# EAGLE board clvHd-Panel (EAGLE 9.6.2), part 1 of 2
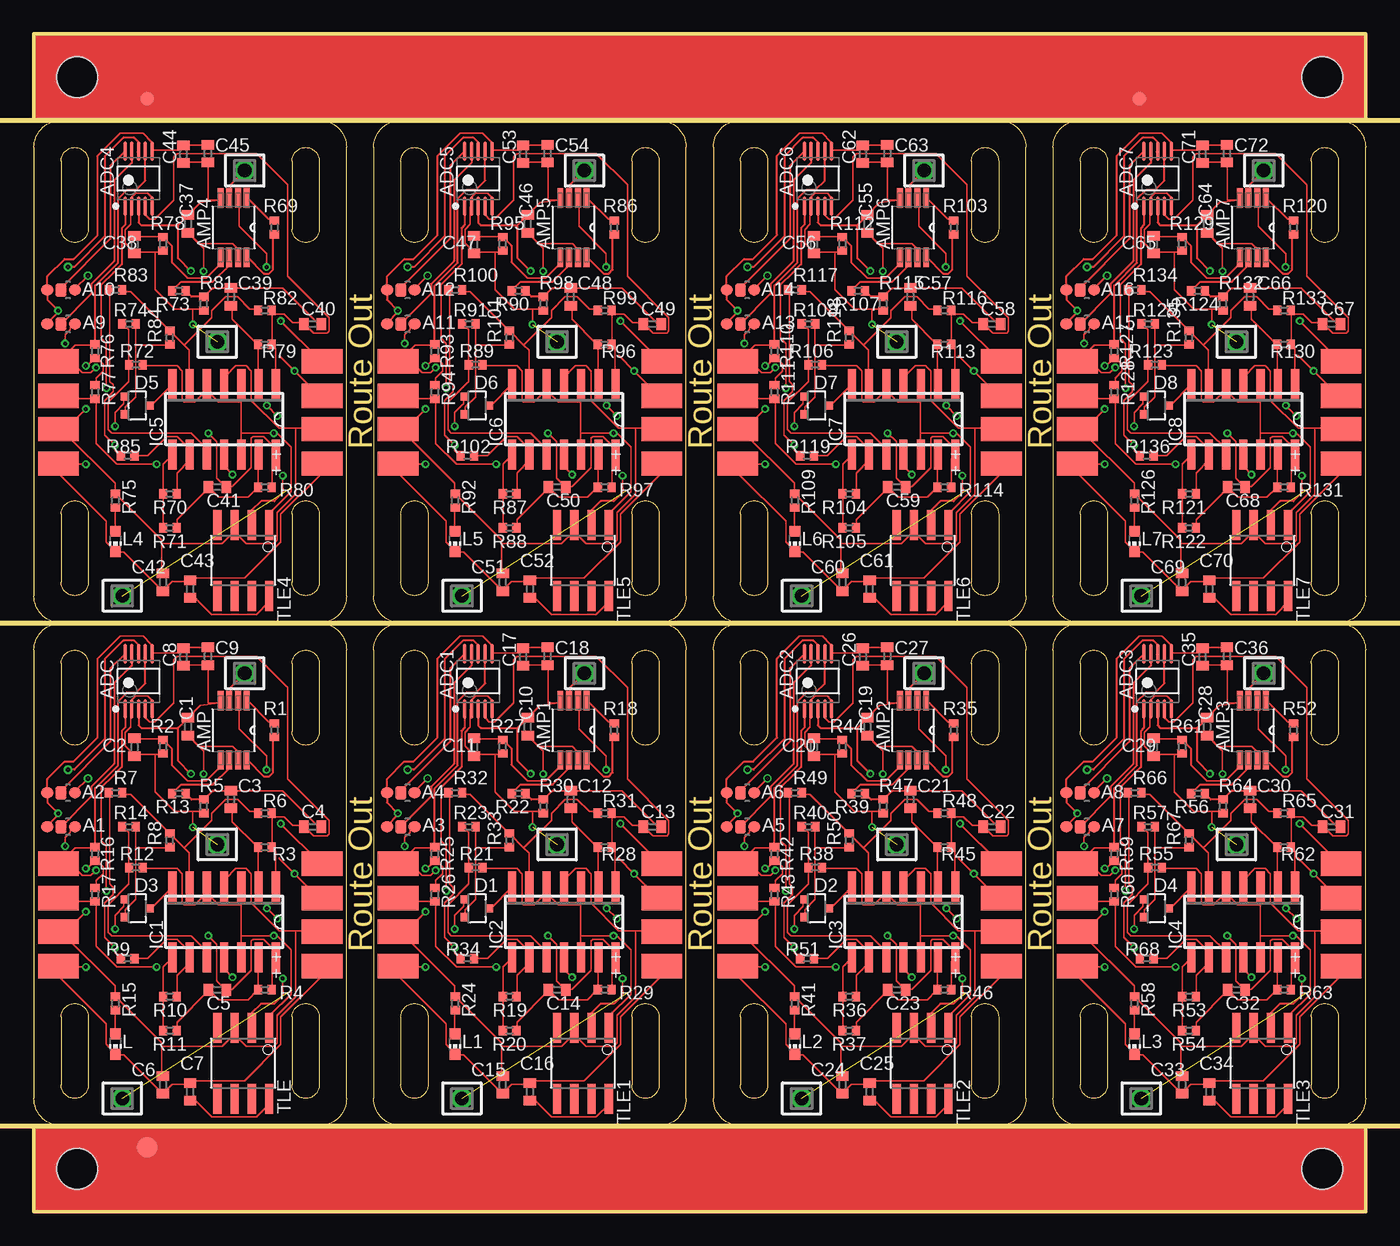
[diagram p0: board, top side]
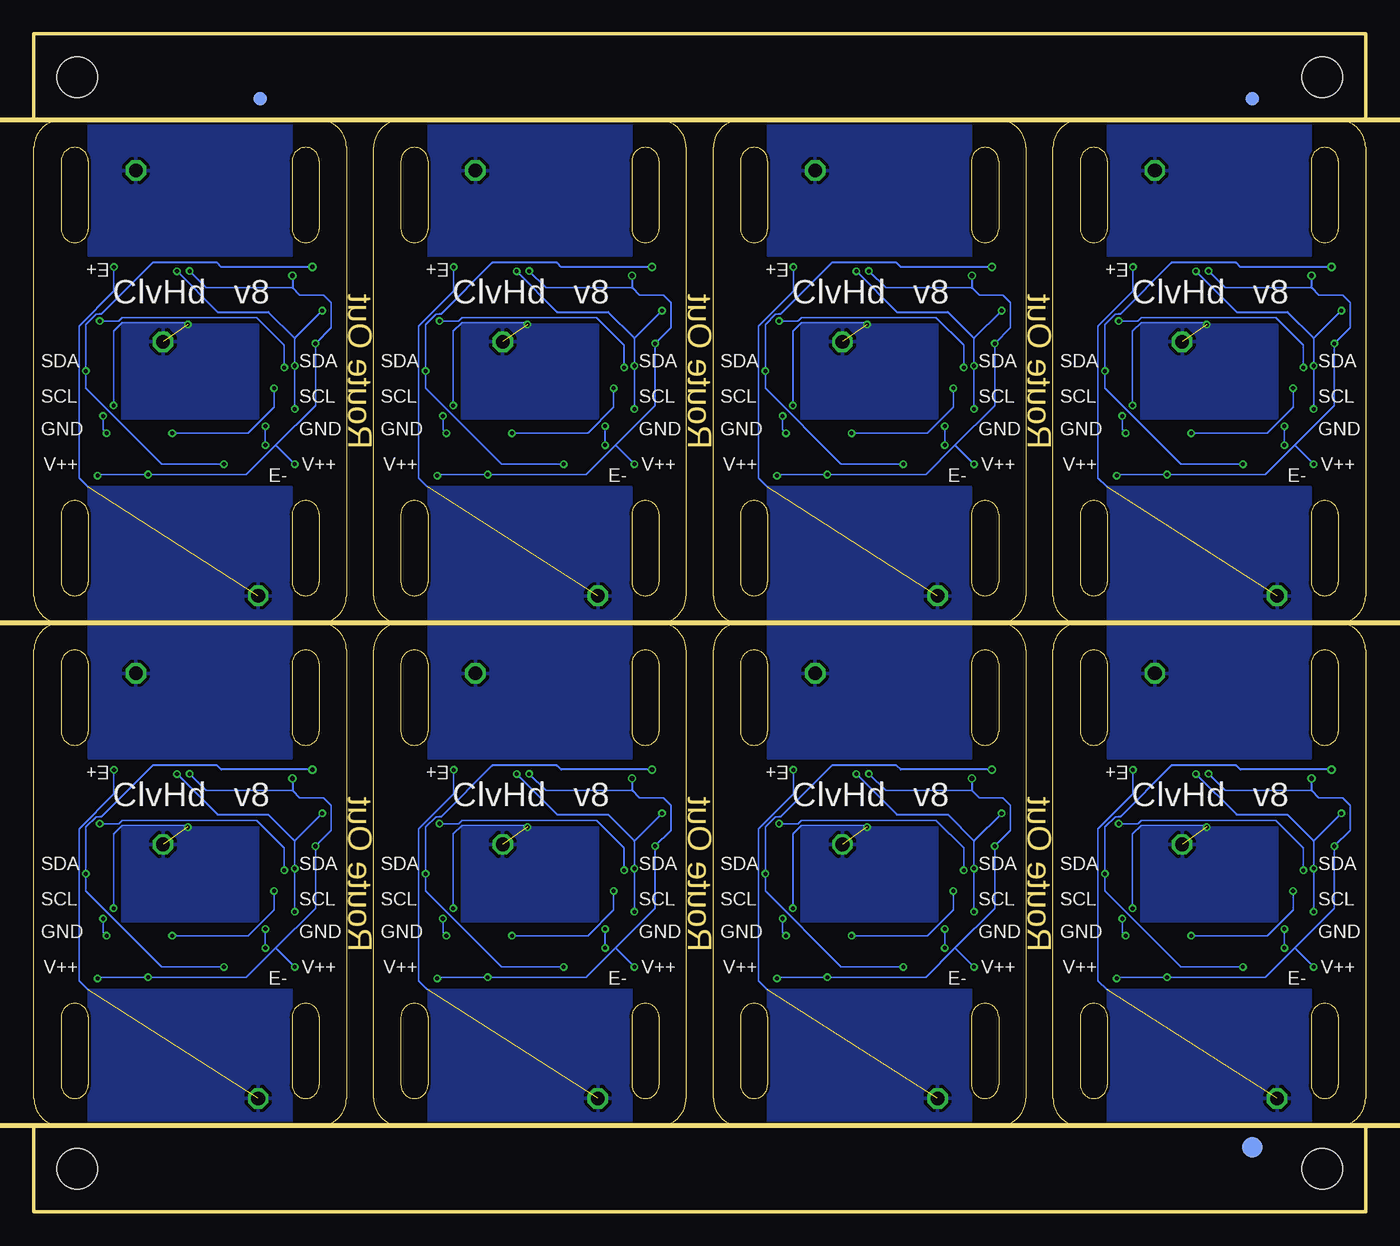
[diagram p1: board, bottom side, seen from below]

Size 98 x 86.7 mm. Coordinates in mm from the lower left corner, seen from the top.
Outline: 264 segments
Copper layers (1*16): Top 0.035mm / dielectric 1.5mm / Bottom 0.035mm
Design rules "clvHd": minimum track width 5mil, minimum drill 0.3mm, track to track 5mil, track to pad 5mil, pad to pad 5mil, via to via 5mil, smd to smd 5mil, copper to edge 7mil, drill to drill 7mil, minimum pad ring 5mil, minimum via ring 5mil, stop-mask expansion 2.5mil, vias tented up to drill 25mil, thermal gap 10mil
Holes 3 mm at 3.17,3.17 94.83,3.17 3.17,83.53 94.83,83.53
Milling: 3 lines

## Footprints (pad centres in the part's own frame; a part is rotated, then mirrored left to right if it is on the bottom)
C0R-JMP = smd 0.8 x 0.889: 1 0,1.016; 3 0,-1.016 | smd 1 x 0.8: 2 0,0
MICROCHIP_MCP3427-E-UN_0 = smd 1.45 x 0.25: 1 -2.025,1; 2 -2.025,0.5; 3 -2.025,0; 4 -2.025,-0.5; 5 -2.025,-1; 6 2.025,-1; 7 2.025,-0.5; 8 2.025,0; 9 2.025,0.5; 10 2.025,1
SOP65P490X110-8N = smd 1.422 x 0.432: 1 -2.184,0.965; 2 -2.184,0.33; 3 -2.184,-0.33; 4 -2.184,-0.965; 5 2.184,-0.965; 6 2.184,-0.33; 7 2.184,0.33; 8 2.184,0.965
C0402 = smd 0.7 x 0.9: 1 -0.65,0; 2 0.65,0
SOT323 = smd 0.6 x 0.55: 1 -0.65,-0.925; 2 0.65,-0.925; 3 0,0.925
FIDUCIAL-1X2 = smd 1 x 1: 1 0,0
FIDUCIAL-1.5X3 = smd 1.5 x 1.5: 1 0,0
SO14 = smd 0.6 x 2.2: 1 -3.81,-2.6; 2 -2.54,-2.6; 3 -1.27,-2.6; 4 0,-2.6; 5 1.27,-2.6; 6 2.54,-2.6; 7 3.81,-2.6; 8 3.81,2.6; 9 2.54,2.6; 10 1.27,2.6; 11 0,2.6; 12 -1.27,2.6; 13 -2.54,2.6; 14 -3.81,2.6
CHIP-LED0603 = smd 0.8 x 0.8: A 0,-0.75; C 0,0.75
R0402 = smd 0.6 x 0.7: 1 -0.5,0; 2 0.5,0
SO-8 = smd 0.61 x 2.21: 1 -1.905,-2.616; 2 -0.635,-2.616; 3 0.635,-2.616; 4 1.905,-2.616; 5 1.905,2.616; 6 0.635,2.616; 7 -0.635,2.616; 8 -1.905,2.616
009176002 = smd 1.8 x 3: 1 -1.27,0; 2 1.27,0
SSW-101-02-G-S = drill 1 pad 1.5 octagon: 1 0,0

## Placement (x,y rotation side)
A1  0R-JUMPC  [C0R-JMP]  2,28.35 270 top
A2  0R-JUMPC  [C0R-JMP]  2,30.85 270 top
A3  0R-JUMPC  [C0R-JMP]  27,28.35 270 top
A4  0R-JUMPC  [C0R-JMP]  27,30.85 270 top
A5  0R-JUMPC  [C0R-JMP]  52,28.35 270 top
A6  0R-JUMPC  [C0R-JMP]  52,30.85 270 top
A7  0R-JUMPC  [C0R-JMP]  77,28.35 270 top
A8  0R-JUMPC  [C0R-JMP]  77,30.85 270 top
A9  0R-JUMPC  [C0R-JMP]  2,65.35 270 top
A10  0R-JUMPC  [C0R-JMP]  2,67.85 270 top
A11  0R-JUMPC  [C0R-JMP]  27,65.35 270 top
A12  0R-JUMPC  [C0R-JMP]  27,67.85 270 top
A13  0R-JUMPC  [C0R-JMP]  52,65.35 270 top
A14  0R-JUMPC  [C0R-JMP]  52,67.85 270 top
A15  0R-JUMPC  [C0R-JMP]  77,65.35 270 top
A16  0R-JUMPC  [C0R-JMP]  77,67.85 270 top
ADC  MICROCHIP_MCP3427-E-UNMICROCHIP_MCP3427-E-UN_0_0  [MICROCHIP_MCP3427-E-UN_0]  7.7,39.05 90 top
ADC1  MICROCHIP_MCP3427-E-UNMICROCHIP_MCP3427-E-UN_0_0  [MICROCHIP_MCP3427-E-UN_0]  32.7,39.05 90 top
ADC2  MICROCHIP_MCP3427-E-UNMICROCHIP_MCP3427-E-UN_0_0  [MICROCHIP_MCP3427-E-UN_0]  57.7,39.05 90 top
ADC3  MICROCHIP_MCP3427-E-UNMICROCHIP_MCP3427-E-UN_0_0  [MICROCHIP_MCP3427-E-UN_0]  82.7,39.05 90 top
ADC4  MICROCHIP_MCP3427-E-UNMICROCHIP_MCP3427-E-UN_0_0  [MICROCHIP_MCP3427-E-UN_0]  7.7,76.05 90 top
ADC5  MICROCHIP_MCP3427-E-UNMICROCHIP_MCP3427-E-UN_0_0  [MICROCHIP_MCP3427-E-UN_0]  32.7,76.05 90 top
ADC6  MICROCHIP_MCP3427-E-UNMICROCHIP_MCP3427-E-UN_0_0  [MICROCHIP_MCP3427-E-UN_0]  57.7,76.05 90 top
ADC7  MICROCHIP_MCP3427-E-UNMICROCHIP_MCP3427-E-UN_0_0  [MICROCHIP_MCP3427-E-UN_0]  82.7,76.05 90 top
AMP  INA326EA/250  [SOP65P490X110-8N]  14.7,35.45 270 top
AMP1  INA326EA/250  [SOP65P490X110-8N]  39.7,35.45 270 top
AMP2  INA326EA/250  [SOP65P490X110-8N]  64.7,35.45 270 top
AMP3  INA326EA/250  [SOP65P490X110-8N]  89.7,35.45 270 top
AMP4  INA326EA/250  [SOP65P490X110-8N]  14.7,72.45 270 top
AMP5  INA326EA/250  [SOP65P490X110-8N]  39.7,72.45 270 top
AMP6  INA326EA/250  [SOP65P490X110-8N]  64.7,72.45 270 top
AMP7  INA326EA/250  [SOP65P490X110-8N]  89.7,72.45 270 top
C1  0.1nF  [C0402]  11.34,35.72 90 top
C2  1nF  [C0402]  7.4,34.2 90 top
C3  0.1nF  [C0402]  14.5,30.35 90 top
C4  0.1nF  [C0402]  20.5,28.35 0 top
C5  0.1nF  [C0402]  13.5,16.35 0 top
C6  0.1nF  [C0402]  9.5,9.35 270 top
C7  0.1nF  [C0402]  11.5,8.85 90 top
C8  0.1nF  [C0402]  11,40.85 90 top
C9  0.1nF  [C0402]  12.8,40.9 90 top
C10  0.1nF  [C0402]  36.34,35.72 90 top
C11  1nF  [C0402]  32.4,34.2 90 top
C12  0.1nF  [C0402]  39.5,30.35 90 top
C13  0.1nF  [C0402]  45.5,28.35 0 top
C14  0.1nF  [C0402]  38.5,16.35 0 top
C15  0.1nF  [C0402]  34.5,9.35 270 top
C16  0.1nF  [C0402]  36.5,8.85 90 top
C17  0.1nF  [C0402]  36,40.85 90 top
C18  0.1nF  [C0402]  37.8,40.9 90 top
C19  0.1nF  [C0402]  61.34,35.72 90 top
C20  1nF  [C0402]  57.4,34.2 90 top
C21  0.1nF  [C0402]  64.5,30.35 90 top
C22  0.1nF  [C0402]  70.5,28.35 0 top
C23  0.1nF  [C0402]  63.5,16.35 0 top
C24  0.1nF  [C0402]  59.5,9.35 270 top
C25  0.1nF  [C0402]  61.5,8.85 90 top
C26  0.1nF  [C0402]  61,40.85 90 top
C27  0.1nF  [C0402]  62.8,40.9 90 top
C28  0.1nF  [C0402]  86.34,35.72 90 top
C29  1nF  [C0402]  82.4,34.2 90 top
C30  0.1nF  [C0402]  89.5,30.35 90 top
C31  0.1nF  [C0402]  95.5,28.35 0 top
C32  0.1nF  [C0402]  88.5,16.35 0 top
C33  0.1nF  [C0402]  84.5,9.35 270 top
C34  0.1nF  [C0402]  86.5,8.85 90 top
C35  0.1nF  [C0402]  86,40.85 90 top
C36  0.1nF  [C0402]  87.8,40.9 90 top
C37  0.1nF  [C0402]  11.34,72.72 90 top
C38  1nF  [C0402]  7.4,71.2 90 top
C39  0.1nF  [C0402]  14.5,67.35 90 top
C40  0.1nF  [C0402]  20.5,65.35 0 top
C41  0.1nF  [C0402]  13.5,53.35 0 top
C42  0.1nF  [C0402]  9.5,46.35 270 top
C43  0.1nF  [C0402]  11.5,45.85 90 top
C44  0.1nF  [C0402]  11,77.85 90 top
C45  0.1nF  [C0402]  12.8,77.9 90 top
C46  0.1nF  [C0402]  36.34,72.72 90 top
C47  1nF  [C0402]  32.4,71.2 90 top
C48  0.1nF  [C0402]  39.5,67.35 90 top
C49  0.1nF  [C0402]  45.5,65.35 0 top
C50  0.1nF  [C0402]  38.5,53.35 0 top
C51  0.1nF  [C0402]  34.5,46.35 270 top
C52  0.1nF  [C0402]  36.5,45.85 90 top
C53  0.1nF  [C0402]  36,77.85 90 top
C54  0.1nF  [C0402]  37.8,77.9 90 top
C55  0.1nF  [C0402]  61.34,72.72 90 top
C56  1nF  [C0402]  57.4,71.2 90 top
C57  0.1nF  [C0402]  64.5,67.35 90 top
C58  0.1nF  [C0402]  70.5,65.35 0 top
C59  0.1nF  [C0402]  63.5,53.35 0 top
C60  0.1nF  [C0402]  59.5,46.35 270 top
C61  0.1nF  [C0402]  61.5,45.85 90 top
C62  0.1nF  [C0402]  61,77.85 90 top
C63  0.1nF  [C0402]  62.8,77.9 90 top
C64  0.1nF  [C0402]  86.34,72.72 90 top
C65  1nF  [C0402]  82.4,71.2 90 top
C66  0.1nF  [C0402]  89.5,67.35 90 top
C67  0.1nF  [C0402]  95.5,65.35 0 top
C68  0.1nF  [C0402]  88.5,53.35 0 top
C69  0.1nF  [C0402]  84.5,46.35 270 top
C70  0.1nF  [C0402]  86.5,45.85 90 top
C71  0.1nF  [C0402]  86,77.85 90 top
C72  0.1nF  [C0402]  87.8,77.9 90 top
D1  HSMS-285C  [SOT323]  32.6,22.35 270 top
D2  HSMS-285C  [SOT323]  57.6,22.35 270 top
D3  HSMS-285C  [SOT323]  7.6,22.35 270 top
D4  HSMS-285C  [SOT323]  82.6,22.35 270 top
D5  HSMS-285C  [SOT323]  7.6,59.35 270 top
D6  HSMS-285C  [SOT323]  32.6,59.35 270 top
D7  HSMS-285C  [SOT323]  57.6,59.35 270 top
D8  HSMS-285C  [SOT323]  82.6,59.35 270 top
E$1  [FIDUCIAL-1X2]  8.35,81.94 0 top
E$2  [FIDUCIAL-1X2]  8.35,81.94 0 bottom
E$3  [FIDUCIAL-1X2]  81.36,81.94 0 top
E$4  [FIDUCIAL-1X2]  81.36,81.94 0 bottom
E$5  [FIDUCIAL-1.5X3]  8.35,4.76 0 top
E$6  [FIDUCIAL-1.5X3]  8.35,4.76 0 bottom
IC1  LMV324M  [SO14]  14,21.35 180 top
IC2  LMV324M  [SO14]  39,21.35 180 top
IC3  LMV324M  [SO14]  64,21.35 180 top
IC4  LMV324M  [SO14]  89,21.35 180 top
IC5  LMV324M  [SO14]  14,58.35 180 top
IC6  LMV324M  [SO14]  39,58.35 180 top
IC7  LMV324M  [SO14]  64,58.35 180 top
IC8  LMV324M  [SO14]  89,58.35 180 top
L  [CHIP-LED0603]  6,12.35 180 top
L1  [CHIP-LED0603]  31,12.35 180 top
L2  [CHIP-LED0603]  56,12.35 180 top
L3  [CHIP-LED0603]  81,12.35 180 top
L4  [CHIP-LED0603]  6,49.35 180 top
L5  [CHIP-LED0603]  31,49.35 180 top
L6  [CHIP-LED0603]  56,49.35 180 top
L7  [CHIP-LED0603]  81,49.35 180 top
R1  100k  [R0402]  17.7,35.45 270 top
R2  100k  [R0402]  9.5,34.25 90 top
R3  100k  [R0402]  17,26.85 0 top
R4  100k  [R0402]  17,16.35 0 top
R5  100k  [R0402]  12.5,29.85 270 top
R6  100k  [R0402]  17,29.35 180 top
R7  100k  [R0402]  6,30.85 180 top
R8  100k  [R0402]  10,27.35 270 top
R9  100k  [R0402]  6.9,18.65 0 top
R10  100k  [R0402]  10,15.85 180 top
R11  100k  [R0402]  10,13.35 0 top
R12  100k  [R0402]  7.5,25.35 180 top
R13  100k  [R0402]  10.67,30.79 0 top
R14  100k  [R0402]  7,28.35 0 top
R15  [R0402]  6,15.35 270 top
R16  100k  [R0402]  4.5,26.35 90 top
R17  100k  [R0402]  4.5,23.35 270 top
R18  100k  [R0402]  42.7,35.45 270 top
R19  100k  [R0402]  35,15.85 180 top
R20  100k  [R0402]  35,13.35 0 top
R21  100k  [R0402]  32.5,25.35 180 top
R22  100k  [R0402]  35.67,30.79 0 top
R23  100k  [R0402]  32,28.35 0 top
R24  [R0402]  31,15.35 270 top
R25  100k  [R0402]  29.5,26.35 90 top
R26  100k  [R0402]  29.5,23.35 270 top
R27  100k  [R0402]  34.5,34.25 90 top
R28  100k  [R0402]  42,26.85 0 top
R29  100k  [R0402]  42,16.35 0 top
R30  100k  [R0402]  37.5,29.85 270 top
R31  100k  [R0402]  42,29.35 180 top
R32  100k  [R0402]  31,30.85 180 top
R33  100k  [R0402]  35,27.35 270 top
R34  100k  [R0402]  31.9,18.65 0 top
R35  100k  [R0402]  67.7,35.45 270 top
R36  100k  [R0402]  60,15.85 180 top
R37  100k  [R0402]  60,13.35 0 top
R38  100k  [R0402]  57.5,25.35 180 top
R39  100k  [R0402]  60.67,30.79 0 top
R40  100k  [R0402]  57,28.35 0 top
R41  [R0402]  56,15.35 270 top
R42  100k  [R0402]  54.5,26.35 90 top
R43  100k  [R0402]  54.5,23.35 270 top
R44  100k  [R0402]  59.5,34.25 90 top
R45  100k  [R0402]  67,26.85 0 top
R46  100k  [R0402]  67,16.35 0 top
R47  100k  [R0402]  62.5,29.85 270 top
R48  100k  [R0402]  67,29.35 180 top
R49  100k  [R0402]  56,30.85 180 top
R50  100k  [R0402]  60,27.35 270 top
R51  100k  [R0402]  56.9,18.65 0 top
R52  100k  [R0402]  92.7,35.45 270 top
R53  100k  [R0402]  85,15.85 180 top
R54  100k  [R0402]  85,13.35 0 top
R55  100k  [R0402]  82.5,25.35 180 top
R56  100k  [R0402]  85.67,30.79 0 top
R57  100k  [R0402]  82,28.35 0 top
R58  [R0402]  81,15.35 270 top
R59  100k  [R0402]  79.5,26.35 90 top
R60  100k  [R0402]  79.5,23.35 270 top
R61  100k  [R0402]  84.5,34.25 90 top
R62  100k  [R0402]  92,26.85 0 top
R63  100k  [R0402]  92,16.35 0 top
R64  100k  [R0402]  87.5,29.85 270 top
R65  100k  [R0402]  92,29.35 180 top
R66  100k  [R0402]  81,30.85 180 top
R67  100k  [R0402]  85,27.35 270 top
R68  100k  [R0402]  81.9,18.65 0 top
R69  100k  [R0402]  17.7,72.45 270 top
R70  100k  [R0402]  10,52.85 180 top
R71  100k  [R0402]  10,50.35 0 top
R72  100k  [R0402]  7.5,62.35 180 top
R73  100k  [R0402]  10.67,67.79 0 top
R74  100k  [R0402]  7,65.35 0 top
R75  [R0402]  6,52.35 270 top
R76  100k  [R0402]  4.5,63.35 90 top
R77  100k  [R0402]  4.5,60.35 270 top
R78  100k  [R0402]  9.5,71.25 90 top
R79  100k  [R0402]  17,63.85 0 top
R80  100k  [R0402]  17,53.35 0 top
R81  100k  [R0402]  12.5,66.85 270 top
R82  100k  [R0402]  17,66.35 180 top
R83  100k  [R0402]  6,67.85 180 top
R84  100k  [R0402]  10,64.35 270 top
R85  100k  [R0402]  6.9,55.65 0 top
R86  100k  [R0402]  42.7,72.45 270 top
R87  100k  [R0402]  35,52.85 180 top
R88  100k  [R0402]  35,50.35 0 top
R89  100k  [R0402]  32.5,62.35 180 top
R90  100k  [R0402]  35.67,67.79 0 top
R91  100k  [R0402]  32,65.35 0 top
R92  [R0402]  31,52.35 270 top
R93  100k  [R0402]  29.5,63.35 90 top
R94  100k  [R0402]  29.5,60.35 270 top
R95  100k  [R0402]  34.5,71.25 90 top
R96  100k  [R0402]  42,63.85 0 top
R97  100k  [R0402]  42,53.35 0 top
R98  100k  [R0402]  37.5,66.85 270 top
R99  100k  [R0402]  42,66.35 180 top
R100  100k  [R0402]  31,67.85 180 top
R101  100k  [R0402]  35,64.35 270 top
R102  100k  [R0402]  31.9,55.65 0 top
R103  100k  [R0402]  67.7,72.45 270 top
R104  100k  [R0402]  60,52.85 180 top
R105  100k  [R0402]  60,50.35 0 top
R106  100k  [R0402]  57.5,62.35 180 top
R107  100k  [R0402]  60.67,67.79 0 top
R108  100k  [R0402]  57,65.35 0 top
R109  [R0402]  56,52.35 270 top
R110  100k  [R0402]  54.5,63.35 90 top
R111  100k  [R0402]  54.5,60.35 270 top
R112  100k  [R0402]  59.5,71.25 90 top
R113  100k  [R0402]  67,63.85 0 top
R114  100k  [R0402]  67,53.35 0 top
R115  100k  [R0402]  62.5,66.85 270 top
R116  100k  [R0402]  67,66.35 180 top
R117  100k  [R0402]  56,67.85 180 top
R118  100k  [R0402]  60,64.35 270 top
R119  100k  [R0402]  56.9,55.65 0 top
R120  100k  [R0402]  92.7,72.45 270 top
R121  100k  [R0402]  85,52.85 180 top
R122  100k  [R0402]  85,50.35 0 top
R123  100k  [R0402]  82.5,62.35 180 top
R124  100k  [R0402]  85.67,67.79 0 top
R125  100k  [R0402]  82,65.35 0 top
R126  [R0402]  81,52.35 270 top
R127  100k  [R0402]  79.5,63.35 90 top
R128  100k  [R0402]  79.5,60.35 270 top
R129  100k  [R0402]  84.5,71.25 90 top
R130  100k  [R0402]  92,63.85 0 top
R131  100k  [R0402]  92,53.35 0 top
R132  100k  [R0402]  87.5,66.85 270 top
R133  100k  [R0402]  92,66.35 180 top
R134  100k  [R0402]  81,67.85 180 top
R135  100k  [R0402]  85,64.35 270 top
R136  100k  [R0402]  81.9,55.65 0 top
TLE  TLE2426CD  [SO-8]  15.4,10.95 180 top
TLE1  TLE2426CD  [SO-8]  40.4,10.95 180 top
TLE2  TLE2426CD  [SO-8]  65.4,10.95 180 top
TLE3  TLE2426CD  [SO-8]  90.4,10.95 180 top
TLE4  TLE2426CD  [SO-8]  15.4,47.95 180 top
TLE5  TLE2426CD  [SO-8]  40.4,47.95 180 top
TLE6  TLE2426CD  [SO-8]  65.4,47.95 180 top
TLE7  TLE2426CD  [SO-8]  90.4,47.95 180 top
X1  009176002  [009176002]  21.2,19.35 90 top
X2  009176002  [009176002]  21.2,24.35 270 top
X3  SSW-101-02-G-S  [SSW-101-02-G-S]  6.5,8.35 180 top
X4  009176002  [009176002]  1.8,19.35 90 top
X5  SSW-101-02-G-S  [SSW-101-02-G-S]  15.51,39.65 180 top
X6  009176002  [009176002]  1.8,24.35 270 top
X7  SSW-101-02-G-S  [SSW-101-02-G-S]  13.5,27.05 180 top
X8  009176002  [009176002]  46.2,19.35 90 top
X9  009176002  [009176002]  46.2,24.35 270 top
X10  009176002  [009176002]  26.8,19.35 90 top
X11  009176002  [009176002]  26.8,24.35 270 top
X12  SSW-101-02-G-S  [SSW-101-02-G-S]  31.5,8.35 180 top
X13  SSW-101-02-G-S  [SSW-101-02-G-S]  40.51,39.65 180 top
X14  SSW-101-02-G-S  [SSW-101-02-G-S]  38.5,27.05 180 top
X15  009176002  [009176002]  71.2,19.35 90 top
X16  009176002  [009176002]  71.2,24.35 270 top
X17  009176002  [009176002]  51.8,19.35 90 top
X18  009176002  [009176002]  51.8,24.35 270 top
X19  SSW-101-02-G-S  [SSW-101-02-G-S]  56.5,8.35 180 top
X20  SSW-101-02-G-S  [SSW-101-02-G-S]  65.51,39.65 180 top
X21  SSW-101-02-G-S  [SSW-101-02-G-S]  63.5,27.05 180 top
X22  009176002  [009176002]  96.2,19.35 90 top
X23  009176002  [009176002]  96.2,24.35 270 top
X24  009176002  [009176002]  76.8,19.35 90 top
X25  009176002  [009176002]  76.8,24.35 270 top
X26  SSW-101-02-G-S  [SSW-101-02-G-S]  81.5,8.35 180 top
X27  SSW-101-02-G-S  [SSW-101-02-G-S]  90.51,39.65 180 top
X28  SSW-101-02-G-S  [SSW-101-02-G-S]  88.5,27.05 180 top
X29  009176002  [009176002]  21.2,56.35 90 top
X30  009176002  [009176002]  21.2,61.35 270 top
X31  009176002  [009176002]  1.8,56.35 90 top
X32  009176002  [009176002]  1.8,61.35 270 top
X33  SSW-101-02-G-S  [SSW-101-02-G-S]  6.5,45.35 180 top
X34  SSW-101-02-G-S  [SSW-101-02-G-S]  15.51,76.65 180 top
X35  SSW-101-02-G-S  [SSW-101-02-G-S]  13.5,64.05 180 top
X36  009176002  [009176002]  46.2,56.35 90 top
X37  009176002  [009176002]  46.2,61.35 270 top
X38  009176002  [009176002]  26.8,56.35 90 top
X39  009176002  [009176002]  26.8,61.35 270 top
X40  SSW-101-02-G-S  [SSW-101-02-G-S]  31.5,45.35 180 top
X41  SSW-101-02-G-S  [SSW-101-02-G-S]  40.51,76.65 180 top
X42  SSW-101-02-G-S  [SSW-101-02-G-S]  38.5,64.05 180 top
X43  009176002  [009176002]  71.2,56.35 90 top
X44  009176002  [009176002]  71.2,61.35 270 top
X45  009176002  [009176002]  51.8,56.35 90 top
X46  009176002  [009176002]  51.8,61.35 270 top
X47  SSW-101-02-G-S  [SSW-101-02-G-S]  56.5,45.35 180 top
X48  SSW-101-02-G-S  [SSW-101-02-G-S]  65.51,76.65 180 top
X49  SSW-101-02-G-S  [SSW-101-02-G-S]  63.5,64.05 180 top
X50  009176002  [009176002]  96.2,56.35 90 top
X51  009176002  [009176002]  96.2,61.35 270 top
X52  009176002  [009176002]  76.8,56.35 90 top
X53  009176002  [009176002]  76.8,61.35 270 top
X54  SSW-101-02-G-S  [SSW-101-02-G-S]  81.5,45.35 180 top
X55  SSW-101-02-G-S  [SSW-101-02-G-S]  90.51,76.65 180 top
X56  SSW-101-02-G-S  [SSW-101-02-G-S]  88.5,64.05 180 top

## Library data of the parts
A1-A16 = jump-0r-smd
ADC ADC1-ADC7 = UN; CIIVA_IDS: 1029210; COMPONENT_LINK_1_DESCRIPTION: Manufacturer URL; COMPONENT_LINK_1_URL: http://www.microchip.com/; COMPONENT_LINK_3_DESCRIPTION: Package Specification; COMPONENT_LINK_3_URL: http://www.microchip.com/stellent/groups/techpub_sg/documents/packagingspec/en012702.pdf; DATASHEET: http://ww1.microchip.com/downloads/en/DeviceDoc/22226a.pdf; DATASHEET_VERSION: revA, Dec-2009; FOOTPRINT_VARIANT_NAME_0: Level C; FOOTPRINT_VARIANT_NAME_1: Level B; FOOTPRINT_VARIANT_NAME_2: Level A; IMPORTED: yes; IMPORTED_FROM: vault; IMPORT_TS: 1521848675; MF: Microchip; MPN: MCP3427-E/UN; PACKAGE: MSOP-UN10; PACKAGE_DESCRIPTION: 10-Lead Plastic Micro Small Outline Package (UN) [MSOP]; PACKAGE_VERSION: revBB, Aug-2009; PIN_0_0_2_INSIDE_EDGE: clock; PREFIX: U; RELEASE_DATE: 1331949051; VAULT_GUID: A68823D5-815D-456C-A47E-4251F2B2754A; VAULT_REVISION: E4767321-FC88-4F77-9C9C-64A9666F4DA4
AMP AMP1-AMP7 = INA326EA_250; DESCRIPTION: Precision, Low Drift, CMOS Instrumentation Amplifier 8-VSSOP -40 to 85; DIGI-KEY_PART_NUMBER: 296-15312-1-ND; DIGI-KEY_PURCHASE_URL: https://www.digikey.com/product-detail/en/texas-instruments/INA326EA-250/296-15312-1-ND/568254?utm_source=snapeda&utm_medium=aggregator&utm_campaign=symbol; MF: Texas Instruments; MP: INA326EA/250; PACKAGE: MSOP-8 Texas Instruments
C1-C72 = rcl; SPICEPREFIX: C
D1-D8 = avago
E$1-E$4 = SparkFun-Aesthetics
E$5 E$6 = SparkFun-Retired
IC1-IC8 = linear; SPICEPREFIX: J
L L1-L7 = led
R1-R136 = rcl; SPICEPREFIX: R
TLE TLE1-TLE7 = tle2426
X1 X2 X4 X6 X8-X11 X15-X18 X22-X25 X29-X32 X36-X39 X43-X46 X50-X53 = con-avxPerso; MPN: 009176002001006; OC_FARNELL: 1582834; OC_NEWARK: 66M1960
X3 X5 X7 X12-X14 X19-X21 X26-X28 X33-X35 X40-X42 X47-X49 X54-X56 = con-samtec; MF: Samtec Inc.; MPN: SSW-101-02-G-S; OC_FARNELL: unknown; OC_NEWARK: 11P9336

## Nets
GNDA: ADC.2 ADC.5 C2.1 IC1.3 IC1.5 IC1.12 R2.1 R5.2 R12.1 TLE.1 X7.1
GNDA1: ADC1.2 ADC1.5 C11.1 IC2.3 IC2.5 IC2.12 R21.1 R27.1 R30.2 TLE1.1 X14.1
GNDA2: ADC2.2 ADC2.5 C20.1 IC3.3 IC3.5 IC3.12 R38.1 R44.1 R47.2 TLE2.1 X21.1
GNDA3: ADC3.2 ADC3.5 C29.1 IC4.3 IC4.5 IC4.12 R55.1 R61.1 R64.2 TLE3.1 X28.1
GNDA4: ADC4.2 ADC4.5 C38.1 IC5.3 IC5.5 IC5.12 R72.1 R78.1 R81.2 TLE4.1 X35.1
GNDA5: ADC5.2 ADC5.5 C47.1 IC6.3 IC6.5 IC6.12 R89.1 R95.1 R98.2 TLE5.1 X42.1
GNDA6: ADC6.2 ADC6.5 C56.1 IC7.3 IC7.5 IC7.12 R106.1 R112.1 R115.2 TLE6.1 X49.1
GNDA7: ADC7.2 ADC7.5 C65.1 IC8.3 IC8.5 IC8.12 R123.1 R129.1 R132.2 TLE7.1 X56.1
INM: AMP.2 X3.1
INM1: AMP1.2 X12.1
INM2: AMP2.2 X19.1
INM3: AMP3.2 X26.1
INM4: AMP4.2 X33.1
INM5: AMP5.2 X40.1
INM6: AMP6.2 X47.1
INM7: AMP7.2 X54.1
INP: AMP.3 X5.1
INP1: AMP1.3 X13.1
INP2: AMP2.3 X20.1
INP3: AMP3.3 X27.1
INP4: AMP4.3 X34.1
INP5: AMP5.3 X41.1
INP6: AMP6.3 X48.1
INP7: AMP7.3 X55.1
N$1: AMP.1 R1.1
N$2: AMP.8 R1.2
N$3: IC2.6 R31.2 R32.1 R33.1
N$4: AMP.5 C2.2 R2.2
N$5: D1.1 R32.2 R34.1
N$6: C3.1 IC1.2 R3.1
N$7: C3.2 C4.2 R5.1 R13.2
N$8: C5.1 IC1.13 R4.1 R11.2
N$9: AMP.6 R13.1
N$10: IC1.6 R6.2 R7.1 R8.1
N$11: D3.2 R8.2 R14.2
N$12: IC1.9 R9.2 R10.1
N$13: D3.3 IC1.7
N$14: D3.1 R7.2 R9.1
N$15: IC1.8 R10.2 R11.1
N$16: ADC.1 C5.2 IC1.14 R4.2
N$17: ADC.7 R16.2 X2.1 X6.1
N$18: IC1.10 R12.2 R14.1
N$19: D1.2 R23.2 R33.2
N$20: IC2.9 R19.1 R34.2
N$21: IC2.8 R19.2 R20.1
N$22: AMP1.5 C11.2 R27.2
N$23: ADC.4 C4.1 IC1.1 R3.2 R6.1
N$24: C12.2 C13.2 R22.2 R30.1
N$25: C12.1 IC2.2 R28.1
N$26: ADC1.4 C13.1 IC2.1 R28.2 R31.1
N$27: C14.1 IC2.13 R20.2 R29.1
N$28: ADC1.1 C14.2 IC2.14 R29.2
N$29: AMP1.6 R22.1
N$30: AMP1.1 R18.1
N$31: AMP1.8 R18.2
N$32: IC2.10 R21.2 R23.1
N$33: L1.A R24.2
N$34: D1.3 IC2.7
N$35: C16.1 TLE1.8
N$36: ADC1.7 R25.2 X9.1 X11.1
N$37: ADC1.8 R26.2 X9.2 X11.2
N$38: A3.2 ADC1.9
N$39: A4.2 ADC1.10
N$40: IC3.6 R48.2 R49.1 R50.1
N$41: D2.1 R49.2 R51.1
N$42: D2.2 R40.2 R50.2
N$43: IC3.9 R36.1 R51.2
N$44: IC3.8 R36.2 R37.1
N$45: AMP2.5 C20.2 R44.2
N$46: C21.2 C22.2 R39.2 R47.1
N$47: C21.1 IC3.2 R45.1
N$48: ADC2.4 C22.1 IC3.1 R45.2 R48.1
N$49: C23.1 IC3.13 R37.2 R46.1
N$50: ADC2.1 C23.2 IC3.14 R46.2
N$51: AMP2.6 R39.1
N$52: AMP2.1 R35.1
N$53: AMP2.8 R35.2
N$54: L.A R15.2
N$55: C7.1 TLE.8
N$56: ADC.8 R17.2 X2.2 X6.2
N$57: A1.2 ADC.9
N$58: A2.2 ADC.10
N$59: IC3.10 R38.2 R40.1
N$60: L2.A R41.2
N$61: D2.3 IC3.7
N$62: C25.1 TLE2.8
N$63: ADC2.7 R42.2 X16.1 X18.1
N$64: ADC2.8 R43.2 X16.2 X18.2
N$65: A5.2 ADC2.9
N$66: A6.2 ADC2.10
N$67: IC4.6 R65.2 R66.1 R67.1
N$68: D4.1 R66.2 R68.1
N$69: D4.2 R57.2 R67.2
N$70: IC4.9 R53.1 R68.2
N$71: IC4.8 R53.2 R54.1
N$72: AMP3.5 C29.2 R61.2
N$73: C30.2 C31.2 R56.2 R64.1
N$74: C30.1 IC4.2 R62.1
N$75: ADC3.4 C31.1 IC4.1 R62.2 R65.1
N$76: C32.1 IC4.13 R54.2 R63.1
N$77: ADC3.1 C32.2 IC4.14 R63.2
N$78: AMP3.6 R56.1
N$79: AMP3.1 R52.1
N$80: AMP3.8 R52.2
N$81: IC4.10 R55.2 R57.1
N$82: L3.A R58.2
N$83: D4.3 IC4.7
N$84: C34.1 TLE3.8
N$85: ADC3.7 R59.2 X23.1 X25.1
N$86: ADC3.8 R60.2 X23.2 X25.2
N$87: A7.2 ADC3.9
N$88: A8.2 ADC3.10
N$89: IC5.6 R82.2 R83.1 R84.1
N$90: D5.1 R83.2 R85.1
N$91: D5.2 R74.2 R84.2
N$92: IC5.9 R70.1 R85.2
N$93: IC5.8 R70.2 R71.1
N$94: AMP4.5 C38.2 R78.2
N$95: C39.2 C40.2 R73.2 R81.1
N$96: C39.1 IC5.2 R79.1
N$97: ADC4.4 C40.1 IC5.1 R79.2 R82.1
N$98: C41.1 IC5.13 R71.2 R80.1
N$99: ADC4.1 C41.2 IC5.14 R80.2
N$100: AMP4.6 R73.1
N$101: AMP4.1 R69.1
N$102: AMP4.8 R69.2
N$103: IC5.10 R72.2 R74.1
N$104: L4.A R75.2
N$105: D5.3 IC5.7
N$106: C43.1 TLE4.8
N$107: ADC4.7 R76.2 X30.1 X32.1
N$108: ADC4.8 R77.2 X30.2 X32.2
N$109: A9.2 ADC4.9
N$110: A10.2 ADC4.10
N$111: IC6.6 R99.2 R100.1 R101.1
N$112: D6.1 R100.2 R102.1
N$113: D6.2 R91.2 R101.2
N$114: IC6.9 R87.1 R102.2
N$115: IC6.8 R87.2 R88.1
N$116: AMP5.5 C47.2 R95.2
N$117: C48.2 C49.2 R90.2 R98.1
N$118: C48.1 IC6.2 R96.1
N$119: ADC5.4 C49.1 IC6.1 R96.2 R99.1
N$120: C50.1 IC6.13 R88.2 R97.1
N$121: ADC5.1 C50.2 IC6.14 R97.2
N$122: AMP5.6 R90.1
N$123: AMP5.1 R86.1
N$124: AMP5.8 R86.2
N$125: IC6.10 R89.2 R91.1
N$126: L5.A R92.2
N$127: D6.3 IC6.7
N$128: C52.1 TLE5.8
N$129: ADC5.7 R93.2 X37.1 X39.1
N$130: ADC5.8 R94.2 X37.2 X39.2
N$131: A11.2 ADC5.9
N$132: A12.2 ADC5.10
N$133: IC7.6 R116.2 R117.1 R118.1
N$134: D7.1 R117.2 R119.1
N$135: D7.2 R108.2 R118.2
N$136: IC7.9 R104.1 R119.2
N$137: IC7.8 R104.2 R105.1
N$138: AMP6.5 C56.2 R112.2
N$139: C57.2 C58.2 R107.2 R115.1
N$140: C57.1 IC7.2 R113.1
N$141: ADC6.4 C58.1 IC7.1 R113.2 R116.1
N$142: C59.1 IC7.13 R105.2 R114.1
N$143: ADC6.1 C59.2 IC7.14 R114.2
N$144: AMP6.6 R107.1
N$145: AMP6.1 R103.1
N$146: AMP6.8 R103.2
N$147: IC7.10 R106.2 R108.1
N$148: L6.A R109.2
N$149: D7.3 IC7.7
N$150: C61.1 TLE6.8
N$151: ADC6.7 R110.2 X44.1 X46.1
N$152: ADC6.8 R111.2 X44.2 X46.2
N$153: A13.2 ADC6.9
N$154: A14.2 ADC6.10
N$155: IC8.6 R133.2 R134.1 R135.1
N$156: D8.1 R134.2 R136.1
N$157: D8.2 R125.2 R135.2
N$158: IC8.9 R121.1 R136.2
N$159: IC8.8 R121.2 R122.1
N$160: AMP7.5 C65.2 R129.2
N$161: C66.2 C67.2 R124.2 R132.1
N$162: C66.1 IC8.2 R130.1
N$163: ADC7.4 C67.1 IC8.1 R130.2 R133.1
N$164: C68.1 IC8.13 R122.2 R131.1
N$165: ADC7.1 C68.2 IC8.14 R131.2
N$166: AMP7.6 R124.1
N$167: AMP7.1 R120.1
N$168: AMP7.8 R120.2
N$169: IC8.10 R123.2 R125.1
N$170: L7.A R126.2
N$171: D8.3 IC8.7
N$172: C70.1 TLE7.8
N$173: ADC7.7 R127.2 X51.1 X53.1
N$174: ADC7.8 R128.2 X51.2 X53.2
N$175: A15.2 ADC7.9
N$176: A16.2 ADC7.10
V+: A1.3 A2.3 ADC.6 AMP.7 C1.1 C6.1 C8.2 C9.2 IC1.4 R15.1 R16.1 R17.1 TLE.3 X1.2 X4.2
V+1: A3.3 A4.3 ADC1.6 AMP1.7 C10.1 C15.1 C17.2 C18.2 IC2.4 R24.1 R25.1 R26.1 TLE1.3 X8.2 X10.2
V+2: A5.3 A6.3 ADC2.6 AMP2.7 C19.1 C24.1 C26.2 C27.2 IC3.4 R41.1 R42.1 R43.1 TLE2.3 X15.2 X17.2
V+3: A7.3 A8.3 ADC3.6 AMP3.7 C28.1 C33.1 C35.2 C36.2 IC4.4 R58.1 R59.1 R60.1 TLE3.3 X22.2 X24.2
V+4: A9.3 A10.3 ADC4.6 AMP4.7 C37.1 C42.1 C44.2 C45.2 IC5.4 R75.1 R76.1 R77.1 TLE4.3 X29.2 X31.2
V+5: A11.3 A12.3 ADC5.6 AMP5.7 C46.1 C51.1 C53.2 C54.2 IC6.4 R92.1 R93.1 R94.1 TLE5.3 X36.2 X38.2
V+6: A13.3 A14.3 ADC6.6 AMP6.7 C55.1 C60.1 C62.2 C63.2 IC7.4 R109.1 R110.1 R111.1 TLE6.3 X43.2 X45.2
V+7: A15.3 A16.3 ADC7.6 AMP7.7 C64.1 C69.1 C71.2 C72.2 IC8.4 R126.1 R127.1 R128.1 TLE7.3 X50.2 X52.2
V-: A1.1 A2.1 ADC.3 AMP.4 C1.2 C6.2 C7.2 C8.1 C9.1 IC1.11 L.C TLE.2 X1.1 X4.1
V-1: A3.1 A4.1 ADC1.3 AMP1.4 C10.2 C15.2 C16.2 C17.1 C18.1 IC2.11 L1.C TLE1.2 X8.1 X10.1
V-2: A5.1 A6.1 ADC2.3 AMP2.4 C19.2 C24.2 C25.2 C26.1 C27.1 IC3.11 L2.C TLE2.2 X15.1 X17.1
V-3: A7.1 A8.1 ADC3.3 AMP3.4 C28.2 C33.2 C34.2 C35.1 C36.1 IC4.11 L3.C TLE3.2 X22.1 X24.1
V-4: A9.1 A10.1 ADC4.3 AMP4.4 C37.2 C42.2 C43.2 C44.1 C45.1 IC5.11 L4.C TLE4.2 X29.1 X31.1
V-5: A11.1 A12.1 ADC5.3 AMP5.4 C46.2 C51.2 C52.2 C53.1 C54.1 IC6.11 L5.C TLE5.2 X36.1 X38.1
V-6: A13.1 A14.1 ADC6.3 AMP6.4 C55.2 C60.2 C61.2 C62.1 C63.1 IC7.11 L6.C TLE6.2 X43.1 X45.1
V-7: A15.1 A16.1 ADC7.3 AMP7.4 C64.2 C69.2 C70.2 C71.1 C72.1 IC8.11 L7.C TLE7.2 X50.1 X52.1

## Tracks (layer width: path | path; a pad name or v marks a point on that pad's centre or on a via)
GNDA  (via drill 0.3)  (1 unrouted)
  Top 0.127: ADC.5 8.64,37.08 8.64,37.72 8.38,37.97 7.49,37.97 7.24,37.72 7.24,37.08 ADC.2 7.11,36.96 7.11,35.69 6.73,35.31 6.73,34.29 7.37,33.66 C2.1 7.49,33.66 8.94,33.66 | 8.94,33.66 9.4,33.66 R2.1 | 11.68,29.46 10.38,29.46 8.94,30.9 8.94,33.66 | 11.68,29.46 12.45,29.46 R5.2 | v11.68,28.32 11.68,29.46 | 12.7,23.49 11.81,22.61 11.05,22.61 10.92,22.73 10.92,24.89 10.54,25.27 8,25.27 R12.1 | 12.7,23.49 12.7,23.88 IC1.5 12.7,23.49 | 15.24,22.61 15.24,23.88 IC1.3 | 15.24,22.61 15.24,20.32 | 15.24,20.32 15.24,18.8 IC1.12 | 15.24,20.32 v17.65,20.32 17.91,20.32 18.92,19.3 18.92,16.01 17.4,14.49 17.4,13.59 TLE.1 | 12.7,23.49 13.59,22.61 15.24,22.61 | v17.91,21.59 v17.14,22.35
  Bottom 0.127: v11.68,28.32 11.81,28.45 16.51,28.45 17.14,27.81 v17.14,22.35 | v17.91,21.59 17.91,20.57 v17.65,20.32
  pour Bottom: 6.5,28.35 6.5,21.35 16.5,21.35 16.5,28.35
GNDA1  (via drill 0.3)  (1 unrouted)
  Top 0.127: ADC1.5 33.64,37.08 33.64,37.72 33.38,37.97 32.49,37.97 32.24,37.72 32.24,37.08 ADC1.2 32.11,36.96 32.11,35.69 31.73,35.31 31.73,34.29 32.37,33.66 C11.1 32.49,33.66 33.94,33.66 | 33.94,33.66 34.4,33.66 R27.1 | 36.69,29.46 35.38,29.46 33.94,30.9 33.94,33.66 | 36.69,29.46 37.45,29.46 R30.2 | v36.69,28.32 36.69,29.46 | 37.7,23.49 36.81,22.61 36.05,22.61 35.92,22.73 35.92,24.89 35.54,25.27 33,25.27 R21.1 | 37.7,23.49 37.7,23.88 IC2.5 37.7,23.49 | 40.24,22.61 40.24,23.88 IC2.3 | 40.24,22.61 40.24,20.32 | 40.24,20.32 40.24,18.8 IC2.12 | 40.24,20.32 v42.65,20.32 42.91,20.32 43.92,19.3 43.92,16.01 42.4,14.49 42.4,13.59 TLE1.1 | 37.7,23.49 38.59,22.61 40.24,22.61 | v42.91,21.59 v42.15,22.35
  Bottom 0.127: v36.69,28.32 36.81,28.45 41.51,28.45 42.15,27.81 v42.15,22.35 | v42.91,21.59 42.91,20.57 v42.65,20.32
  pour Bottom: 31.5,28.35 31.5,21.35 41.5,21.35 41.5,28.35
GNDA2  (via drill 0.3)  (1 unrouted)
  Top 0.127: ADC2.5 58.64,37.08 58.64,37.72 58.38,37.97 57.49,37.97 57.24,37.72 57.24,37.08 ADC2.2 57.11,36.96 57.11,35.69 56.73,35.31 56.73,34.29 57.37,33.66 C20.1 57.49,33.66 58.94,33.66 | 58.94,33.66 59.4,33.66 R44.1 | 61.68,29.46 60.38,29.46 58.94,30.9 58.94,33.66 | 61.68,29.46 62.45,29.46 R47.2 | v61.68,28.32 61.68,29.46 | 62.7,23.49 61.81,22.61 61.05,22.61 60.92,22.73 60.92,24.89 60.54,25.27 58,25.27 R38.1 | 62.7,23.49 62.7,23.88 IC3.5 62.7,23.49 | 65.24,22.61 65.24,23.88 IC3.3 | 65.24,22.61 65.24,20.32 | 65.24,20.32 65.24,18.8 IC3.12 | 65.24,20.32 v67.65,20.32 67.91,20.32 68.92,19.3 68.92,16.01 67.4,14.49 67.4,13.59 TLE2.1 | 62.7,23.49 63.59,22.61 65.24,22.61 | v67.91,21.59 v67.14,22.35
  Bottom 0.127: v61.68,28.32 61.81,28.45 66.51,28.45 67.14,27.81 v67.14,22.35 | v67.91,21.59 67.91,20.57 v67.65,20.32
  pour Bottom: 56.5,28.35 56.5,21.35 66.5,21.35 66.5,28.35
GNDA3  (via drill 0.3)  (1 unrouted)
  Top 0.127: ADC3.5 83.64,37.08 83.64,37.72 83.38,37.97 82.49,37.97 82.24,37.72 82.24,37.08 ADC3.2 82.11,36.96 82.11,35.69 81.73,35.31 81.73,34.29 82.37,33.66 C29.1 82.49,33.66 83.94,33.66 | 83.94,33.66 84.4,33.66 R61.1 | 86.69,29.46 85.38,29.46 83.94,30.9 83.94,33.66 | 86.69,29.46 87.45,29.46 R64.2 | v86.69,28.32 86.69,29.46 | 87.7,23.49 86.81,22.61 86.05,22.61 85.92,22.73 85.92,24.89 85.54,25.27 83,25.27 R55.1 | 87.7,23.49 87.7,23.88 IC4.5 87.7,23.49 | 90.24,22.61 90.24,23.88 IC4.3 | 90.24,22.61 90.24,20.32 | 90.24,20.32 90.24,18.8 IC4.12 | 90.24,20.32 v92.65,20.32 92.91,20.32 93.92,19.3 93.92,16.01 92.4,14.49 92.4,13.59 TLE3.1 | 87.7,23.49 88.59,22.61 90.24,22.61 | v92.91,21.59 v92.15,22.35
  Bottom 0.127: v86.69,28.32 86.81,28.45 91.51,28.45 92.15,27.81 v92.15,22.35 | v92.91,21.59 92.91,20.57 v92.65,20.32
  pour Bottom: 81.5,28.35 81.5,21.35 91.5,21.35 91.5,28.35
GNDA4  (via drill 0.3)  (1 unrouted)
  Top 0.127: ADC4.5 8.64,74.08 8.64,74.72 8.38,74.97 7.49,74.97 7.24,74.72 7.24,74.08 ADC4.2 7.11,73.96 7.11,72.69 6.73,72.31 6.73,71.29 7.37,70.66 C38.1 7.49,70.66 8.94,70.66 | 8.94,70.66 9.4,70.66 R78.1 | 11.68,66.46 10.38,66.46 8.94,67.9 8.94,70.66 | 11.68,66.46 12.45,66.46 R81.2 | v11.68,65.32 11.68,66.46 | 12.7,60.5 11.81,59.61 11.05,59.61 10.92,59.73 10.92,61.89 10.54,62.27 8,62.27 R72.1 | 12.7,60.5 12.7,60.88 IC5.5 12.7,60.5 | 15.24,59.61 15.24,60.88 IC5.3 | 15.24,59.61 15.24,57.32 | 15.24,57.32 15.24,55.8 IC5.12 | 15.24,57.32 v17.65,57.32 17.91,57.32 18.92,56.3 18.92,53.01 17.4,51.49 17.4,50.59 TLE4.1 | 12.7,60.5 13.59,59.61 15.24,59.61 | v17.91,58.59 v17.14,59.35
  Bottom 0.127: v11.68,65.32 11.81,65.45 16.51,65.45 17.14,64.81 v17.14,59.35 | v17.91,58.59 17.91,57.57 v17.65,57.32
  pour Bottom: 6.5,65.35 6.5,58.35 16.5,58.35 16.5,65.35
GNDA5  (via drill 0.3)  (1 unrouted)
  Top 0.127: ADC5.5 33.64,74.08 33.64,74.72 33.38,74.97 32.49,74.97 32.24,74.72 32.24,74.08 ADC5.2 32.11,73.96 32.11,72.69 31.73,72.31 31.73,71.29 32.37,70.66 C47.1 32.49,70.66 33.94,70.66 | 33.94,70.66 34.4,70.66 R95.1 | 36.69,66.46 35.38,66.46 33.94,67.9 33.94,70.66 | 36.69,66.46 37.45,66.46 R98.2 | v36.69,65.32 36.69,66.46 | 37.7,60.5 36.81,59.61 36.05,59.61 35.92,59.73 35.92,61.89 35.54,62.27 33,62.27 R89.1 | 37.7,60.5 37.7,60.88 IC6.5 37.7,60.5 | 40.24,59.61 40.24,60.88 IC6.3 | 40.24,59.61 40.24,57.32 | 40.24,57.32 40.24,55.8 IC6.12 | 40.24,57.32 v42.65,57.32 42.91,57.32 43.92,56.3 43.92,53.01 42.4,51.49 42.4,50.59 TLE5.1 | 37.7,60.5 38.59,59.61 40.24,59.61 | v42.91,58.59 v42.15,59.35
  Bottom 0.127: v36.69,65.32 36.81,65.45 41.51,65.45 42.15,64.81 v42.15,59.35 | v42.91,58.59 42.91,57.57 v42.65,57.32
  pour Bottom: 31.5,65.35 31.5,58.35 41.5,58.35 41.5,65.35
GNDA6  (via drill 0.3)  (1 unrouted)
  Top 0.127: ADC6.5 58.64,74.08 58.64,74.72 58.38,74.97 57.49,74.97 57.24,74.72 57.24,74.08 ADC6.2 57.11,73.96 57.11,72.69 56.73,72.31 56.73,71.29 57.37,70.66 C56.1 57.49,70.66 58.94,70.66 | 58.94,70.66 59.4,70.66 R112.1 | 61.68,66.46 60.38,66.46 58.94,67.9 58.94,70.66 | 61.68,66.46 62.45,66.46 R115.2 | v61.68,65.32 61.68,66.46 | 62.7,60.5 61.81,59.61 61.05,59.61 60.92,59.73 60.92,61.89 60.54,62.27 58,62.27 R106.1 | 62.7,60.5 62.7,60.88 IC7.5 62.7,60.5 | 65.24,59.61 65.24,60.88 IC7.3 | 65.24,59.61 65.24,57.32 | 65.24,57.32 65.24,55.8 IC7.12 | 65.24,57.32 v67.65,57.32 67.91,57.32 68.92,56.3 68.92,53.01 67.4,51.49 67.4,50.59 TLE6.1 | 62.7,60.5 63.59,59.61 65.24,59.61 | v67.91,58.59 v67.14,59.35
  Bottom 0.127: v61.68,65.32 61.81,65.45 66.51,65.45 67.14,64.81 v67.14,59.35 | v67.91,58.59 67.91,57.57 v67.65,57.32
  pour Bottom: 56.5,65.35 56.5,58.35 66.5,58.35 66.5,65.35
GNDA7  (via drill 0.3)  (1 unrouted)
  Top 0.127: ADC7.5 83.64,74.08 83.64,74.72 83.38,74.97 82.49,74.97 82.24,74.72 82.24,74.08 ADC7.2 82.11,73.96 82.11,72.69 81.73,72.31 81.73,71.29 82.37,70.66 C65.1 82.49,70.66 83.94,70.66 | 83.94,70.66 84.4,70.66 R129.1 | 86.69,66.46 85.38,66.46 83.94,67.9 83.94,70.66 | 86.69,66.46 87.45,66.46 R132.2 | v86.69,65.32 86.69,66.46 | 87.7,60.5 86.81,59.61 86.05,59.61 85.92,59.73 85.92,61.89 85.54,62.27 83,62.27 R123.1 | 87.7,60.5 87.7,60.88 IC8.5 87.7,60.5 | 90.24,59.61 90.24,60.88 IC8.3 | 90.24,59.61 90.24,57.32 | 90.24,57.32 90.24,55.8 IC8.12 | 90.24,57.32 v92.65,57.32 92.91,57.32 93.92,56.3 93.92,53.01 92.4,51.49 92.4,50.59 TLE7.1 | 87.7,60.5 88.59,59.61 90.24,59.61 | v92.91,58.59 v92.15,59.35
  Bottom 0.127: v86.69,65.32 86.81,65.45 91.51,65.45 92.15,64.81 v92.15,59.35 | v92.91,58.59 92.91,57.57 v92.65,57.32
  pour Bottom: 81.5,65.35 81.5,58.35 91.5,58.35 91.5,65.35
INM  (via drill 0.3)  (1 unrouted)
  Top 0.127: v17.11,32.54 17.11,33.54 15.11,35.54 15.11,37.59 AMP.2
  Bottom 0.127: v17.11,32.54 17.11,30.77 19.68,28.19 19.68,17.02 19.05,16.38 19,16.35
  pour Bottom: 4,6.35 4,16.35 19,16.35 19,6.35
INM1  (via drill 0.3)  (1 unrouted)
  Top 0.127: v42.11,32.54 42.11,33.54 40.11,35.54 40.11,37.59 AMP1.2
  Bottom 0.127: v42.11,32.54 42.11,30.77 44.69,28.19 44.69,17.02 44.05,16.38 44,16.35
  pour Bottom: 29,6.35 29,16.35 44,16.35 44,6.35
INM2  (via drill 0.3)  (1 unrouted)
  Top 0.127: v67.11,32.54 67.11,33.54 65.11,35.54 65.11,37.59 AMP2.2
  Bottom 0.127: v67.11,32.54 67.11,30.77 69.69,28.19 69.69,17.02 69.05,16.38 69,16.35
  pour Bottom: 54,6.35 54,16.35 69,16.35 69,6.35
INM3  (via drill 0.3)  (1 unrouted)
  Top 0.127: v92.11,32.54 92.11,33.54 90.11,35.54 90.11,37.59 AMP3.2
  Bottom 0.127: v92.11,32.54 92.11,30.77 94.69,28.19 94.69,17.02 94.05,16.38 94,16.35
  pour Bottom: 79,6.35 79,16.35 94,16.35 94,6.35
INM4  (via drill 0.3)  (1 unrouted)
  Top 0.127: v17.11,69.54 17.11,70.54 15.11,72.54 15.11,74.59 AMP4.2
  Bottom 0.127: v17.11,69.54 17.11,67.77 19.68,65.19 19.68,54.02 19.05,53.38 19,53.35
  pour Bottom: 4,43.35 4,53.35 19,53.35 19,43.35
INM5  (via drill 0.3)  (1 unrouted)
  Top 0.127: v42.11,69.54 42.11,70.54 40.11,72.54 40.11,74.59 AMP5.2
  Bottom 0.127: v42.11,69.54 42.11,67.77 44.69,65.19 44.69,54.02 44.05,53.38 44,53.35
  pour Bottom: 29,43.35 29,53.35 44,53.35 44,43.35
INM6  (via drill 0.3)  (1 unrouted)
  Top 0.127: v67.11,69.54 67.11,70.54 65.11,72.54 65.11,74.59 AMP6.2
  Bottom 0.127: v67.11,69.54 67.11,67.77 69.69,65.19 69.69,54.02 69.05,53.38 69,53.35
  pour Bottom: 54,43.35 54,53.35 69,53.35 69,43.35
INM7  (via drill 0.3)  (1 unrouted)
  Top 0.127: v92.11,69.54 92.11,70.54 90.11,72.54 90.11,74.59 AMP7.2
  Bottom 0.127: v92.11,69.54 92.11,67.77 94.69,65.19 94.69,54.02 94.05,53.38 94,53.35
  pour Bottom: 79,43.35 79,53.35 94,53.35 94,43.35
INP
  Top 0.127: AMP.3 14.47,37.71 14.47,38.6 14.46,38.61 X5.1
  pour Bottom: 4,43.35 19,43.35 19,33.38 4,33.38
INP1
  Top 0.127: AMP1.3 39.47,37.71 39.47,38.6 39.47,38.61 X13.1
  pour Bottom: 29,43.35 44,43.35 44,33.38 29,33.38
INP2
  Top 0.127: AMP2.3 64.47,37.71 64.47,38.6 64.47,38.61 X20.1
  pour Bottom: 54,43.35 69,43.35 69,33.38 54,33.38
INP3
  Top 0.127: AMP3.3 89.47,37.71 89.47,38.6 89.47,38.61 X27.1
  pour Bottom: 79,43.35 94,43.35 94,33.38 79,33.38
INP4
  Top 0.127: AMP4.3 14.47,74.71 14.47,75.6 14.46,75.61 X34.1
  pour Bottom: 4,80.35 19,80.35 19,70.38 4,70.38
INP5
  Top 0.127: AMP5.3 39.47,74.71 39.47,75.6 39.47,75.61 X41.1
  pour Bottom: 29,80.35 44,80.35 44,70.38 29,70.38
INP6
  Top 0.127: AMP6.3 64.47,74.71 64.47,75.6 64.47,75.61 X48.1
  pour Bottom: 54,80.35 69,80.35 69,70.38 54,70.38
INP7
  Top 0.127: AMP7.3 89.47,74.71 89.47,75.6 89.47,75.61 X55.1
  pour Bottom: 79,80.35 94,80.35 94,70.38 79,70.38
N$1
  Top 0.127: R1.1 17.65,36.07 17.27,36.07 15.75,37.59 AMP.1
N$2
  Top 0.152: AMP.8 15.71,33.27 16.91,32.06 17.31,32.06 17.59,32.34 17.59,34.84 R1.2
N$3
  Top 0.127: 36.05,26.8 36.43,26.42 36.43,24 IC2.6 | 36.05,26.8 35.03,27.81 R33.1 34.91,27.94 32.11,30.73 31.61,30.73 R32.1 | 36.05,26.8 38.08,28.83 38.08,29.34 39.1,30.35 39.99,30.35 40.88,29.46 41.38,29.46 R31.2
N$4
  Top 0.127: R2.2 9.4,34.8 7.49,34.8 C2.2 | AMP.5 13.73,32.8 12.67,31.73 11.32,31.73 10.14,32.91
  Top 0.152: R2.2 10.14,34.11 10.14,32.91
N$5  (via drill 0.3)
  Top 0.127: v30.97,20.83 30.97,21.84 31.61,22.48 31.61,22.99 D1.1 | R34.1 31.35,18.67 30.97,19.05 v30.97,19.43 30.21,20.19 30.21,22.73 30.84,23.37 30.84,23.88 30.59,24.13 30.59,30.73 R32.2
  Bottom 0.127: v30.97,19.43 v30.97,20.83
N$6
  Top 0.127: IC1.2 16.51,24 16.51,26.8 R3.1 16.38,26.92 14.61,28.7 14.61,29.59 C3.1
N$7
  Top 0.127: 13.21,30.99 14.48,30.99 C3.2 14.61,30.99 18.29,30.99 20.83,28.45 21.08,28.45 C4.2
  Top 0.152: 13.21,30.99 13.14,30.99 R5.1 11.61,30.35 R13.2
N$8
  Top 0.127: R11.2 10.54,13.46 10.54,13.97 12.83,16.26 C5.1 12.95,16.26 13.59,15.62 15.75,15.62 16.38,16.26 R4.1 16.51,16.38 16.51,18.67 IC1.13
N$9
  Top 0.127: 13.17,31.45 14.35,32.64 14.35,33.15 AMP.6
  Top 0.152: 10.16,30.93 R13.1 10.83,31.45 13.17,31.45
N$10
  Top 0.127: 11.05,26.8 11.43,26.42 11.43,24 IC1.6 | 11.05,26.8 10.03,27.81 R8.1 9.91,27.94 7.11,30.73 6.6,30.73 R7.1 | 11.05,26.8 13.08,28.83 13.08,29.34 14.1,30.35 14.99,30.35 15.88,29.46 16.38,29.46 R6.2
N$11
  Top 0.127: 7.49,26.8 7.49,28.32 R14.2 | 7.49,26.8 7.49,22.99 6.73,22.23 6.73,21.72 D3.2 | 7.49,26.8 9.91,26.8 R8.2
N$12
  Top 0.127: R10.1 10.54,15.88 10.54,17.4 11.43,18.29 11.43,18.67 IC1.9 11.43,18.8 11.43,19.18 10.54,20.07 9.78,20.07 8.38,18.67 7.49,18.67 R9.2
N$13
  Top 0.127: D3.3 8.64,22.35 10.16,23.88 IC1.7
N$14  (via drill 0.3)
  Top 0.127: v5.97,20.83 5.97,21.84 6.6,22.48 6.6,22.99 D3.1 | R9.1 6.35,18.67 5.97,19.05 v5.97,19.43 5.21,20.19 5.21,22.73 5.84,23.37 5.84,23.88 5.59,24.13 5.59,30.73 R7.2
  Bottom 0.127: v5.97,19.43 v5.97,20.83
N$15
  Top 0.127: R11.1 9.53,13.46 9.53,15.75 R10.2 9.53,15.88 9.53,18.03 10.16,18.67 IC1.8
N$16  (via drill 0.3)
  Top 0.127: R4.2 17.53,16.38 17.53,18.41 17.78,18.67 IC1.14 17.78,18.8 17.78,19.18 16.89,20.07 16.13,20.07 16,19.94 16,17.78 14.61,16.38 14.22,16.38 C5.2 14.1,16.38 13.46,17.02 13.46,19.69 v12.83,20.32 | 5.85,32.14 4.95,31.24 4.95,27.3 5.33,26.92 v5.33,23.62
  Top 0.152: ADC.1 6.7,35.65 6.46,35.42 6.46,32.75 5.85,32.14
  Bottom 0.127: v5.33,23.62 5.33,22.23 7.24,20.32 v12.83,20.32
N$17  (via drill 0.3)
  Top 0.127: 2.29,26.03 1.91,25.65 X6.1 2.29,26.03 | 2.29,26.03 3.05,26.8 4.45,26.8 R16.2 4.57,26.92 | v18.16,28.58 21.08,25.65 X2.1 | v4.57,25.15 4.19,24.77 3.56,24.77 2.29,26.03
  Top 0.152: R16.2 4.5,31.18 6.18,32.87 6.18,37.57 6.85,38.24 7.53,38.24 8.2,38.91 ADC.7
  Bottom 0.127: v18.16,28.58 16.76,28.58 16.51,28.83 6.6,28.83 4.57,26.8 v4.57,25.15
N$18
  Top 0.127: R14.1 6.6,28.32 6.99,27.94 6.99,25.4 R12.2 6.99,25.27 6.99,24.13 5.46,22.61 5.46,20.57 5.71,20.32 11.56,20.32 12.7,19.18 12.7,18.8 IC1.10
N$19
  Top 0.127: 32.49,26.8 32.49,28.32 R23.2 | 32.49,26.8 32.49,22.99 31.73,22.23 31.73,21.72 D1.2 | 32.49,26.8 34.91,26.8 R33.2
N$20
  Top 0.127: R19.1 35.54,15.88 35.54,17.4 36.43,18.29 36.43,18.67 IC2.9 36.43,18.8 36.43,19.18 35.54,20.07 34.78,20.07 33.38,18.67 32.49,18.67 R34.2
N$21
  Top 0.127: R20.1 34.53,13.46 34.53,15.75 R19.2 34.53,15.88 34.53,18.03 35.16,18.67 IC2.8
N$22
  Top 0.127: R27.2 34.4,34.8 32.49,34.8 C11.2 | AMP1.5 38.74,32.8 37.67,31.73 36.33,31.73 35.15,32.91
  Top 0.152: R27.2 35.15,34.11 35.15,32.91
N$23
  Top 0.127: 17.53,29.08 17.53,29.34 R6.1 17.53,29.08 | 17.53,29.08 17.53,26.92 R3.2 17.53,26.8 17.78,26.54 17.78,24 IC1.1 | 17.53,29.08 18.41,29.08 19.05,28.45 19.81,28.45 C4.1 19.94,28.32 20.57,27.69 21.59,27.69 21.72,27.81 21.72,28.83 18.67,31.88 18.67,38.61 16.38,40.89 10.54,40.89 10.29,40.64 10.29,37.46 8.89,36.07 8.51,36.07 8.26,36.32 8.26,36.96 ADC.4
N$24
  Top 0.127: 38.21,30.99 39.48,30.99 C12.2 39.61,30.99 43.29,30.99 45.83,28.45 46.08,28.45 C13.2
  Top 0.152: 38.21,30.99 38.14,30.99 R30.1 36.61,30.35 R22.2
N$25
  Top 0.127: IC2.2 41.51,24 41.51,26.8 R28.1 41.38,26.92 39.61,28.7 39.61,29.59 C12.1
N$26
  Top 0.127: 42.53,29.08 42.53,29.34 R31.1 42.53,29.08 | 42.53,29.08 42.53,26.92 R28.2 42.53,26.8 42.78,26.54 42.78,24 IC2.1 | 42.53,29.08 43.42,29.08 44.05,28.45 44.81,28.45 C13.1 44.94,28.32 45.58,27.69 46.59,27.69 46.72,27.81 46.72,28.83 43.67,31.88 43.67,38.61 41.38,40.89 35.54,40.89 35.29,40.64 35.29,37.46 33.89,36.07 33.51,36.07 33.26,36.32 33.26,36.96 ADC1.4
N$27
  Top 0.127: R20.2 35.54,13.46 35.54,13.97 37.83,16.26 C14.1 37.95,16.26 38.59,15.62 40.75,15.62 41.38,16.26 R29.1 41.51,16.38 41.51,18.67 IC2.13
N$28  (via drill 0.3)
  Top 0.127: R29.2 42.53,16.38 42.53,18.41 42.78,18.67 IC2.14 42.78,18.8 42.78,19.18 41.89,20.07 41.13,20.07 41,19.94 41,17.78 39.61,16.38 39.23,16.38 C14.2 39.1,16.38 38.46,17.02 38.46,19.69 v37.83,20.32 | 30.86,32.14 29.95,31.24 29.95,27.3 30.34,26.92 v30.34,23.62
  Top 0.152: ADC1.1 31.7,35.65 31.47,35.42 31.47,32.75 30.86,32.14
  Bottom 0.127: v30.34,23.62 30.34,22.23 32.24,20.32 v37.83,20.32
N$29
  Top 0.127: 38.17,31.45 39.35,32.64 39.35,33.15 AMP1.6
  Top 0.152: 35.17,30.93 R22.1 35.83,31.45 38.17,31.45
N$30
  Top 0.127: R18.1 42.65,36.07 42.27,36.07 40.75,37.59 AMP1.1
N$31
  Top 0.152: AMP1.8 40.71,33.27 41.91,32.06 42.31,32.06 42.59,32.34 42.59,34.84 R18.2
N$32
  Top 0.127: R23.1 31.61,28.32 31.99,27.94 31.99,25.4 R21.2 31.99,25.27 31.99,24.13 30.46,22.61 30.46,20.57 30.72,20.32 36.56,20.32 37.7,19.18 37.7,18.8 IC2.10
N$33
  Top 0.127: R24.2 30.97,14.73 30.97,13.21 L1.A
N$34
  Top 0.127: D1.3 33.64,22.35 35.16,23.88 IC2.7
N$35
  Top 0.127: C16.1 36.56,8.13 36.94,8.13 38.08,6.98 41.38,6.98 42.27,7.87 42.27,8.25 TLE1.8
N$36  (via drill 0.3)
  Top 0.127: 27.29,26.03 26.91,25.65 X11.1 27.29,26.03 | 27.29,26.03 28.05,26.8 29.45,26.8 R25.2 29.57,26.92 | v43.16,28.58 46.08,25.65 X9.1 | v29.57,25.15 29.19,24.77 28.56,24.77 27.29,26.03
  Top 0.152: R25.2 29.5,31.18 31.19,32.87 31.19,37.57 31.85,38.24 32.53,38.24 33.2,38.91 ADC1.7
  Bottom 0.127: v43.16,28.58 41.77,28.58 41.51,28.83 31.61,28.83 29.57,26.8 v29.57,25.15
N$37  (via drill 0.3, 0.35)
  Top 0.127: X11.2 26.91,22.99 27.03,22.86 29.45,22.86 R26.2 29.57,22.73 29.57,19.56 31.1,18.03 v34.02,18.03 | v44.18,24.89 46.08,22.99 X9.2 | 32.61,41.02 ADC1.8
  Top 0.152: v44.18,24.89 43.05,26.02 | ADC1.8 32.7,41.72 32.37,42.05 31.57,42.05 30.22,40.7 30.22,34.8 27.97,32.55 v27.51,32.55
  Bottom 0.127: 43.16,29.08 43.42,29.08 44.18,28.32 v44.18,24.89 44.18,23.62 38.59,18.03 v34.02,18.03
  Bottom 0.152: v27.51,32.55 34.21,32.55 34.51,32.86 39.28,32.86 43.05,29.08 43.16,29.08
N$38
  Top 0.152: ADC1.9 32.2,40.22 30.91,38.92 30.91,32.98 29.22,31.3 29.22,30.57 A3.2
N$39
  Top 0.152: ADC1.10 30.63,40 30.63,34.62 27,31 A4.2
N$40
  Top 0.127: 61.05,26.8 61.43,26.42 61.43,24 IC3.6 | 61.05,26.8 60.03,27.81 R50.1 59.91,27.94 57.11,30.73 56.6,30.73 R49.1 | 61.05,26.8 63.08,28.83 63.08,29.34 64.1,30.35 64.99,30.35 65.88,29.46 66.38,29.46 R48.2
N$41  (via drill 0.3)
  Top 0.127: v55.97,20.83 55.97,21.84 56.6,22.48 56.6,22.99 D2.1 | R51.1 56.35,18.67 55.97,19.05 v55.97,19.43 55.21,20.19 55.21,22.73 55.84,23.37 55.84,23.88 55.59,24.13 55.59,30.73 R49.2
  Bottom 0.127: v55.97,19.43 v55.97,20.83
N$42
  Top 0.127: 57.49,26.8 57.49,28.32 R40.2 | 57.49,26.8 57.49,22.99 56.73,22.23 56.73,21.72 D2.2 | 57.49,26.8 59.91,26.8 R50.2
N$43
  Top 0.127: R36.1 60.54,15.88 60.54,17.4 61.43,18.29 61.43,18.67 IC3.9 61.43,18.8 61.43,19.18 60.54,20.07 59.78,20.07 58.38,18.67 57.49,18.67 R51.2
N$44
  Top 0.127: R37.1 59.52,13.46 59.52,15.75 R36.2 59.52,15.88 59.52,18.03 60.16,18.67 IC3.8
N$45
  Top 0.127: R44.2 59.4,34.8 57.49,34.8 C20.2 | AMP2.5 63.73,32.8 62.67,31.73 61.32,31.73 60.14,32.91
  Top 0.152: R44.2 60.14,34.11 60.14,32.91
N$46
  Top 0.127: 63.21,30.99 64.48,30.99 C21.2 64.61,30.99 68.29,30.99 70.83,28.45 71.08,28.45 C22.2
  Top 0.152: 63.21,30.99 63.14,30.99 R47.1 61.6,30.35 R39.2
N$47
  Top 0.127: IC3.2 66.51,24 66.51,26.8 R45.1 66.38,26.92 64.61,28.7 64.61,29.59 C21.1
N$48
  Top 0.127: 67.53,29.08 67.53,29.34 R48.1 67.53,29.08 | 67.53,29.08 67.53,26.92 R45.2 67.53,26.8 67.78,26.54 67.78,24 IC3.1 | 67.53,29.08 68.42,29.08 69.05,28.45 69.81,28.45 C22.1 69.94,28.32 70.57,27.69 71.59,27.69 71.72,27.81 71.72,28.83 68.67,31.88 68.67,38.61 66.38,40.89 60.54,40.89 60.29,40.64 60.29,37.46 58.89,36.07 58.51,36.07 58.26,36.32 58.26,36.96 ADC2.4
N$49
  Top 0.127: R37.2 60.54,13.46 60.54,13.97 62.83,16.26 C23.1 62.95,16.26 63.59,15.62 65.75,15.62 66.38,16.26 R46.1 66.51,16.38 66.51,18.67 IC3.13
N$50  (via drill 0.3)
  Top 0.127: R46.2 67.53,16.38 67.53,18.41 67.78,18.67 IC3.14 67.78,18.8 67.78,19.18 66.89,20.07 66.13,20.07 66,19.94 66,17.78 64.61,16.38 64.22,16.38 C23.2 64.1,16.38 63.46,17.02 63.46,19.69 v62.83,20.32 | 55.85,32.14 54.95,31.24 54.95,27.3 55.33,26.92 v55.33,23.62
  Top 0.152: ADC2.1 56.7,35.65 56.46,35.42 56.46,32.75 55.85,32.14
  Bottom 0.127: v55.33,23.62 55.33,22.23 57.24,20.32 v62.83,20.32
N$51
  Top 0.127: 63.17,31.45 64.35,32.64 64.35,33.15 AMP2.6
  Top 0.152: 60.16,30.93 R39.1 60.83,31.45 63.17,31.45
N$52
  Top 0.127: R35.1 67.65,36.07 67.27,36.07 65.75,37.59 AMP2.1
N$53
  Top 0.152: AMP2.8 65.71,33.27 66.91,32.06 67.31,32.06 67.59,32.34 67.59,34.84 R35.2
N$54
  Top 0.127: R15.2 5.97,14.73 5.97,13.21 L.A
N$55
  Top 0.127: C7.1 11.56,8.13 11.94,8.13 13.08,6.98 16.38,6.98 17.27,7.87 17.27,8.25 TLE.8
N$56  (via drill 0.3, 0.35)
  Top 0.127: X6.2 1.91,22.99 2.03,22.86 4.45,22.86 R17.2 4.57,22.73 4.57,19.56 6.1,18.03 v9.02,18.03 | v19.18,24.89 21.08,22.99 X2.2 | 7.61,41.02 ADC.8
  Top 0.152: v19.18,24.89 18.05,26.02 | ADC.8 7.7,41.72 7.37,42.05 6.57,42.05 5.22,40.7 5.22,34.8 2.97,32.55 v2.5,32.55
  Bottom 0.127: 18.16,29.08 18.41,29.08 19.18,28.32 v19.18,24.89 19.18,23.62 13.59,18.03 v9.02,18.03
  Bottom 0.152: v2.5,32.55 9.21,32.55 9.51,32.86 14.28,32.86 18.05,29.08 18.16,29.08
N$57
  Top 0.152: ADC.9 7.2,40.22 5.91,38.92 5.91,32.98 4.22,31.3 4.22,30.57 A1.2
N$58
  Top 0.152: ADC.10 5.63,40 5.63,34.62 2,31 A2.2
N$59
  Top 0.127: R40.1 56.6,28.32 56.98,27.94 56.98,25.4 R38.2 56.98,25.27 56.98,24.13 55.46,22.61 55.46,20.57 55.72,20.32 61.56,20.32 62.7,19.18 62.7,18.8 IC3.10
N$60
  Top 0.127: R41.2 55.97,14.73 55.97,13.21 L2.A
N$61
  Top 0.127: D2.3 58.64,22.35 60.16,23.88 IC3.7
N$62
  Top 0.127: C25.1 61.56,8.13 61.94,8.13 63.08,6.98 66.38,6.98 67.27,7.87 67.27,8.25 TLE2.8
N$63  (via drill 0.3)
  Top 0.127: 52.29,26.03 51.91,25.65 X18.1 52.29,26.03 | 52.29,26.03 53.05,26.8 54.45,26.8 R42.2 54.57,26.92 | v68.16,28.58 71.08,25.65 X16.1 | v54.57,25.15 54.19,24.77 53.56,24.77 52.29,26.03
  Top 0.152: R42.2 54.5,31.18 56.19,32.87 56.19,37.57 56.85,38.24 57.53,38.24 58.2,38.91 ADC2.7
  Bottom 0.127: v68.16,28.58 66.76,28.58 66.51,28.83 56.6,28.83 54.57,26.8 v54.57,25.15
N$64  (via drill 0.3, 0.35)
  Top 0.127: X18.2 51.91,22.99 52.03,22.86 54.45,22.86 R43.2 54.57,22.73 54.57,19.56 56.1,18.03 v59.02,18.03 | v69.18,24.89 71.08,22.99 X16.2 | 57.61,41.02 ADC2.8
  Top 0.152: v69.18,24.89 68.05,26.02 | ADC2.8 57.7,41.72 57.37,42.05 56.57,42.05 55.22,40.7 55.22,34.8 52.97,32.55 v52.5,32.55
  Bottom 0.127: 68.16,29.08 68.42,29.08 69.18,28.32 v69.18,24.89 69.18,23.62 63.59,18.03 v59.02,18.03
  Bottom 0.152: v52.5,32.55 59.21,32.55 59.51,32.86 64.28,32.86 68.05,29.08 68.16,29.08
N$65
  Top 0.152: ADC2.9 57.2,40.22 55.91,38.92 55.91,32.98 54.22,31.3 54.22,30.57 A5.2
N$66
  Top 0.152: ADC2.10 55.63,40 55.63,34.62 52,31 A6.2
N$67
  Top 0.127: 86.05,26.8 86.43,26.42 86.43,24 IC4.6 | 86.05,26.8 85.03,27.81 R67.1 84.91,27.94 82.11,30.73 81.61,30.73 R66.1 | 86.05,26.8 88.08,28.83 88.08,29.34 89.1,30.35 89.99,30.35 90.88,29.46 91.38,29.46 R65.2
N$68  (via drill 0.3)
  Top 0.127: v80.97,20.83 80.97,21.84 81.61,22.48 81.61,22.99 D4.1 | R68.1 81.35,18.67 80.97,19.05 v80.97,19.43 80.21,20.19 80.21,22.73 80.84,23.37 80.84,23.88 80.59,24.13 80.59,30.73 R66.2
  Bottom 0.127: v80.97,19.43 v80.97,20.83
N$69
  Top 0.127: 82.49,26.8 82.49,28.32 R57.2 | 82.49,26.8 82.49,22.99 81.73,22.23 81.73,21.72 D4.2 | 82.49,26.8 84.91,26.8 R67.2
N$70
  Top 0.127: R53.1 85.54,15.88 85.54,17.4 86.43,18.29 86.43,18.67 IC4.9 86.43,18.8 86.43,19.18 85.54,20.07 84.78,20.07 83.38,18.67 82.49,18.67 R68.2
N$71
  Top 0.127: R54.1 84.53,13.46 84.53,15.75 R53.2 84.53,15.88 84.53,18.03 85.16,18.67 IC4.8
N$72
  Top 0.127: R61.2 84.4,34.8 82.49,34.8 C29.2 | AMP3.5 88.74,32.8 87.67,31.73 86.33,31.73 85.14,32.91
  Top 0.152: R61.2 85.14,34.11 85.14,32.91
N$73
  Top 0.127: 88.21,30.99 89.48,30.99 C30.2 89.61,30.99 93.29,30.99 95.83,28.45 96.08,28.45 C31.2
  Top 0.152: 88.21,30.99 88.14,30.99 R64.1 86.61,30.35 R56.2
N$74
  Top 0.127: IC4.2 91.51,24 91.51,26.8 R62.1 91.38,26.92 89.61,28.7 89.61,29.59 C30.1
N$75
  Top 0.127: 92.53,29.08 92.53,29.34 R65.1 92.53,29.08 | 92.53,29.08 92.53,26.92 R62.2 92.53,26.8 92.78,26.54 92.78,24 IC4.1 | 92.53,29.08 93.42,29.08 94.05,28.45 94.81,28.45 C31.1 94.94,28.32 95.58,27.69 96.59,27.69 96.72,27.81 96.72,28.83 93.67,31.88 93.67,38.61 91.38,40.89 85.54,40.89 85.29,40.64 85.29,37.46 83.89,36.07 83.51,36.07 83.26,36.32 83.26,36.96 ADC3.4
N$76
  Top 0.127: R54.2 85.54,13.46 85.54,13.97 87.83,16.26 C32.1 87.95,16.26 88.59,15.62 90.75,15.62 91.38,16.26 R63.1 91.51,16.38 91.51,18.67 IC4.13
N$77  (via drill 0.3)
  Top 0.127: R63.2 92.53,16.38 92.53,18.41 92.78,18.67 IC4.14 92.78,18.8 92.78,19.18 91.89,20.07 91.13,20.07 91,19.94 91,17.78 89.61,16.38 89.22,16.38 C32.2 89.1,16.38 88.46,17.02 88.46,19.69 v87.83,20.32 | 80.86,32.14 79.95,31.24 79.95,27.3 80.33,26.92 v80.33,23.62
  Top 0.152: ADC3.1 81.7,35.65 81.47,35.42 81.47,32.75 80.86,32.14
  Bottom 0.127: v80.33,23.62 80.33,22.23 82.24,20.32 v87.83,20.32
N$78
  Top 0.127: 88.17,31.45 89.35,32.64 89.35,33.15 AMP3.6
  Top 0.152: 85.17,30.93 R56.1 85.83,31.45 88.17,31.45
N$79
  Top 0.127: R52.1 92.65,36.07 92.27,36.07 90.75,37.59 AMP3.1
N$80
  Top 0.152: AMP3.8 90.71,33.27 91.92,32.06 92.31,32.06 92.59,32.34 92.59,34.84 R52.2
N$81
  Top 0.127: R57.1 81.61,28.32 81.99,27.94 81.99,25.4 R55.2 81.99,25.27 81.99,24.13 80.46,22.61 80.46,20.57 80.72,20.32 86.56,20.32 87.7,19.18 87.7,18.8 IC4.10
N$82
  Top 0.127: R58.2 80.97,14.73 80.97,13.21 L3.A
N$83
  Top 0.127: D4.3 83.64,22.35 85.16,23.88 IC4.7
N$84
  Top 0.127: C34.1 86.56,8.13 86.94,8.13 88.08,6.98 91.38,6.98 92.27,7.87 92.27,8.25 TLE3.8
N$85  (via drill 0.3)
  Top 0.127: 77.29,26.03 76.91,25.65 X25.1 77.29,26.03 | 77.29,26.03 78.05,26.8 79.45,26.8 R59.2 79.57,26.92 | v93.16,28.58 96.08,25.65 X23.1 | v79.57,25.15 79.19,24.77 78.56,24.77 77.29,26.03
  Top 0.152: R59.2 79.5,31.18 81.19,32.87 81.19,37.57 81.85,38.24 82.53,38.24 83.2,38.91 ADC3.7